# EAGLE board Remotuino-v3 (EAGLE 6.3)
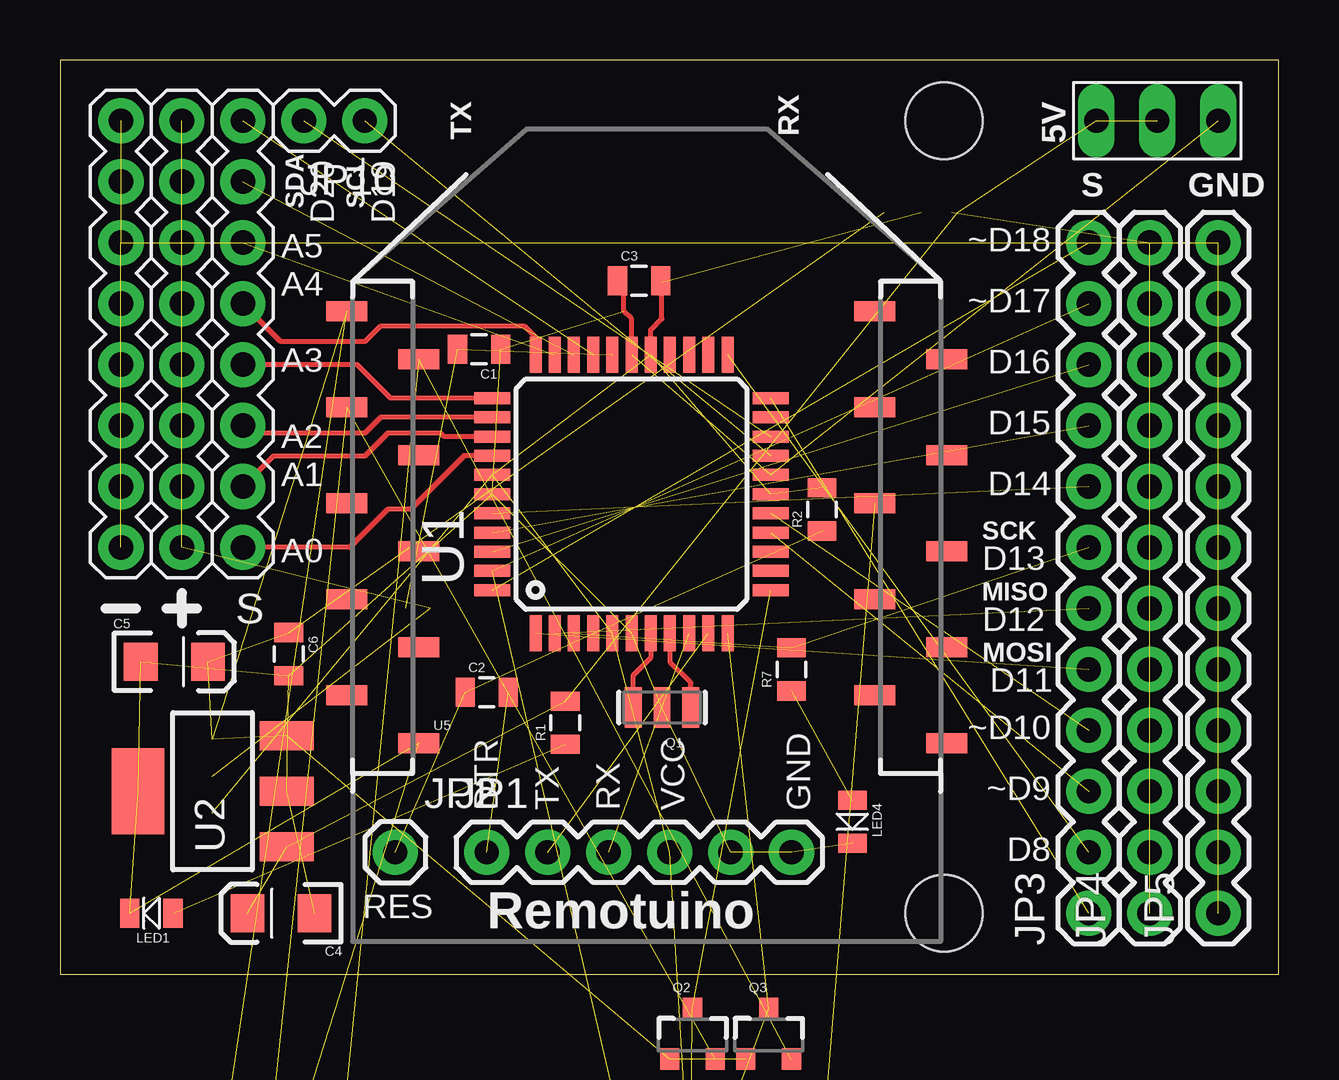
[diagram p0: board, top side]
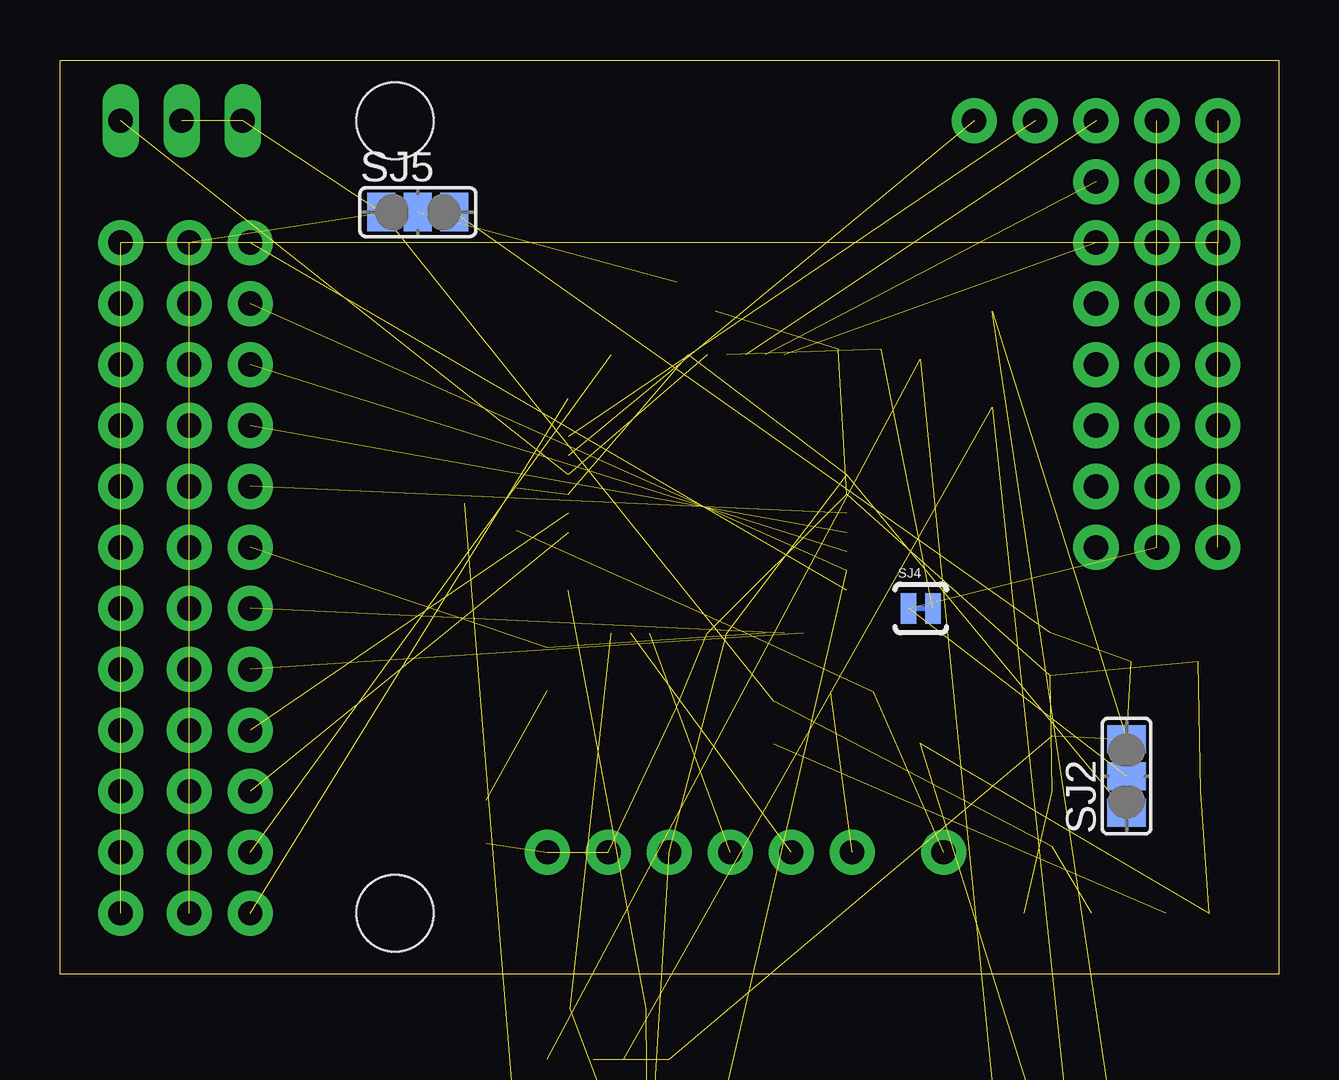
[diagram p1: board, bottom side, seen from below]

Size 50.79 x 38.09 mm. Coordinates in mm from the lower left corner, seen from the top.
Outline: 0,0 50.79,0 50.79,38.09 0,38.09 0,0
Copper layers (1*16): Top 0.035mm / dielectric 1.5mm / Bottom 0.035mm
Design rules "default *": minimum track width 10mil, minimum drill 24mil, track to track 8mil, track to pad 8mil, pad to pad 8mil, via to via 8mil, smd to smd 8mil, copper to edge 40mil, drill to drill 8mil, minimum pad ring 10mil, minimum via ring 8mil, stop-mask expansion 4mil, vias tented up to drill 0mil, thermal gap 10mil
Net classes: 0 default: width 0.203 mm; 1 vcc: width 0.254 mm
Holes 3.2 mm at 36.83,35.56 36.83,2.54
tRestrict: area 44.9,32.5 to 46.5,34.6

## Footprints (pad centres in the part's own frame; a part is rotated, then mirrored left to right if it is on the bottom)
0805 = smd 0.8 x 1.2: 1 -0.9,0; 2 0.9,0
EIA3216 = smd 1.4 x 1.6: A 1.4,0; C -1.4,0
1X06 = drill 1.016 pad 1.88: 1 0,0; 2 2.54,0; 3 5.08,0; 4 7.62,0; 5 10.16,0; 6 12.7,0
1X01 = drill 1.016 pad 1.88: 1 0,0
1X12 = drill 1.016 pad 1.88: 1 0,0; 2 2.54,0; 3 5.08,0; 4 7.62,0; 5 10.16,0; 6 12.7,0; 7 15.24,0; 8 17.78,0; 9 20.32,0; 10 22.86,0; 11 25.4,0; 12 27.94,0
1X08 = drill 1.016 pad 1.88: 1 0,0; 2 2.54,0; 3 5.08,0; 4 7.62,0; 5 10.16,0; 6 12.7,0; 7 15.24,0; 8 17.78,0
1X3_LONGPAD = drill 1.016 pad 1.245 long: 1 0,0; 2 -2.54,0; 3 -5.08,0
1X02 = drill 1.016 pad 1.88: 1 0,0; 2 2.54,0
LED-0805 = smd 0.8 x 1.2: 1 -0.9,0; 2 0.9,0
RESONATOR-SMD = smd 0.7 x 1.7: 1 -1.2,0; 2 0,0; 3 1.2,0
SOT23-3 = smd 0.8 x 0.9: 1 -0.95,-1; 2 0.95,-1; 3 0,1.1
SJ_2WAYS_1-2 = smd 1.168 x 1.6: 1 -1.524,0; 2 0,0; 3 1.524,0
SJ_2S-NO = smd 0.635 x 1.27: 1 -0.45,0; 2 0.45,0
SJ_2S-TRACE = smd 0.635 x 1.27: 1 -0.508,0; 2 0.508,0
TQFP44 = smd 1.5 x 0.5: 1 -5.8,4; 2 -5.8,3.2; 3 -5.8,2.4; 4 -5.8,1.6; 5 -5.8,0.8; 6 -5.8,0; 7 -5.8,-0.8; 8 -5.8,-1.6; 9 -5.8,-2.4; 10 -5.8,-3.2; 11 -5.8,-4; 23 5.8,-4; 24 5.8,-3.2; 25 5.8,-2.4; 26 5.8,-1.6; 27 5.8,-0.8; 28 5.8,0; 29 5.8,0.8; 30 5.8,1.6; 31 5.8,2.4; 32 5.8,3.2; 33 5.8,4 | smd 0.5 x 1.5: 12 -4,-5.8; 13 -3.2,-5.8; 14 -2.4,-5.8; 15 -1.6,-5.8; 16 -0.8,-5.8; 17 0,-5.8; 18 0.8,-5.8; 19 1.6,-5.8; 20 2.4,-5.8; 21 3.2,-5.8; 22 4,-5.8; 34 4,5.8; 35 3.2,5.8; 36 2.4,5.8; 37 1.6,5.8; 38 0.8,5.8; 39 0,5.8; 40 -0.8,5.8; 41 -1.6,5.8; 42 -2.4,5.8; 43 -3.2,5.8; 44 -4,5.8
SOT223 = smd 1.219 x 2.235: 1 -2.311,-3.099; 2 0,-3.099; 3 2.311,-3.099 | smd 3.6 x 2.2: 4 0,3.099
XBEE-SMD = smd 1.7 x 0.85: 1 -12.5,20; 2 -9.5,18; 3 -12.5,16; 4 -9.5,14; 5 -12.5,12; 6 -9.5,10; 7 -12.5,8; 8 -9.5,6; 9 -12.5,4; 10 -9.5,2; 11 12.5,2; 12 9.5,4; 13 12.5,6; 14 9.5,8; 15 12.5,10; 16 9.5,12; 17 12.5,14; 18 9.5,16; 19 12.5,18; 20 9.5,20

## Placement (x,y rotation side)
C1  0.1uF  [0805]  17.46,26.04 180 top
C2  0.1uF  [0805]  17.78,11.75 0 top
C3  0.1uF  [0805]  24.13,28.89 0 top
C4  10uF  [EIA3216]  9.21,2.54 180 top
C5  10uF  [EIA3216]  4.76,13.02 0 top
C6  0.1uF  [0805]  9.53,13.34 270 top
C8  0.1uF  [0805]  1.59,-35.88 0 top  (outside the outline)
JP1  FTDI Basic  [1X06]  17.78,5.08 0 top
JP2  RESET  [1X01]  13.97,5.08 0 top
JP3  M12  [1X12]  42.86,2.54 90 top
JP4  M12  [1X12]  45.4,2.54 90 top
JP5  M12  [1X12]  48.26,2.54 90 top
JP6  M8  [1X08]  7.62,17.78 90 top
JP7  M8  [1X08]  5.08,17.78 90 top
JP8  M8  [1X08]  2.54,17.78 90 top
JP9  M03  [1X3_LONGPAD]  48.26,35.56 0 top
JP10  [1X02]  12.7,35.56 180 top
LED1  Red  [LED-0805]  3.81,2.54 180 top
LED4  Red  [LED-0805]  33.02,6.35 270 top
LED5  Green  [LED-0805]  4.76,-35.88 0 top  (outside the outline)
LED6  Red  [LED-0805]  7.94,-35.88 0 top  (outside the outline)
Q1  16MHz  [RESONATOR-SMD]  25.08,11.11 180 top
Q2  BSS138  [SOT23-3]  26.35,-2.54 0 top
Q3  BSS138  [SOT23-3]  29.53,-2.54 0 top
R1  10K  [0805]  21.06,10.48 90 top
R2  10K  [0805]  31.75,19.37 90 top
R7  1K  [0805]  30.48,12.7 90 top
R8  1K  [0805]  11.11,-35.88 0 top  (outside the outline)
R9  1K  [0805]  14.29,-35.88 0 top  (outside the outline)
R10  1K  [0805]  17.46,-35.88 0 top  (outside the outline)
R11  1K  [0805]  20.64,-35.88 0 top  (outside the outline)
R12  1K  [0805]  23.81,-35.88 0 top  (outside the outline)
R13  1K  [0805]  26.99,-35.88 0 top  (outside the outline)
SJ2  [SJ_2WAYS_1-2]  6.35,8.26 90 bottom
SJ3  [SJ_2S-NO]  29.84,-36.2 0 top  (outside the outline)
SJ4  .  [SJ_2S-TRACE]  14.92,15.24 0 bottom
SJ5  [SJ_2WAYS_1-2]  35.88,31.75 0 bottom
U1  ATMEGA324P  [TQFP44]  23.81,20 90 top
U2  MIC5209-3.3YS  [SOT223]  6.35,7.62 90 top
U5  XBEE  [XBEE-SMD]  24.45,7.62 0 top
U$3  OSHW-LOGOS  [OSHW-LOGO-S]  1.59,-39.37 0 top  (outside the outline)

## Library data of the parts
C1-C6 C8 JP1-JP5 Q1 R1 R2 R7-R13 SJ3 SJ4 U$3 = SparkFun
JP6-JP10 LED1 LED4-LED6 SJ2 SJ5 U1 U2 U5 = wibauxl
Q2 Q3 = SparkFun-DiscreteSemi

## Nets
3.3V: C5.A C6.1 C8.2 Q2.1 Q3.1 R8.2 R9.1 R11.2 R12.2 SJ2.3 SJ5.3 U2.3 U5.1
A0/D24: JP6.1 U1.37
A1/D25: JP6.2 U1.36
A2/D26: JP6.3 U1.35
A3/D27: JP6.4 U1.34
A4/D28: JP6.5 U1.33
A5/D29: JP6.6 U1.32
A6/D30: JP6.7 U1.31
A7/D31: JP6.8 U1.30
AREF: C1.2 SJ4.2 U1.29
D0/RX: JP1.3 U1.9
D1/TX: JP1.2 U1.10
D2/RX1: Q3.3 R10.1 U1.11
D3/TX1: Q2.3 R13.1 U1.12
D4: U1.21
D5: U1.13
D6: U1.14
D7: JP3.1 U1.22
D8: JP3.2 U1.23
D9: JP3.3 U1.15
D10: JP3.4 U1.16
D11/MOSI: JP3.5 U1.1
D12/MISO: JP3.6 U1.2
D13/SCK: JP3.7 R7.2 U1.3
D14: JP3.8 U1.40
D15: JP3.9 U1.41
D16: JP3.10 U1.42
D17: JP3.11 SJ3.2 U1.43
D18: JP3.12 U1.44
D19/SCL: JP10.1 U1.19
D20/SDA: JP10.2 U1.20
D21: U1.24
D22: U1.25
D23: U1.26
DTR: C2.2 JP1.1
GND [vcc]: C1.1 C3.1 C4.C C5.C C6.2 C8.1 JP1.5 JP1.6 JP9.1 LED1.2 LED4.2 Q1.2 U1.6 U1.18 U1.28 U1.39 U2.2 U2.4 U5.10
N$1: Q1.1 U1.8
N$2: Q1.3 U1.7
N$5: LED4.1 R7.1
N$6: LED5.1 R8.1
N$7: LED6.1 R9.2
N$10 [vcc]: JP5.1 JP5.2 JP5.3 JP5.4 JP5.5 JP5.6 JP5.7 JP5.8 JP5.9 JP5.10 JP5.11 JP5.12 JP8.1 JP8.2 JP8.3 JP8.4 JP8.5 JP8.6 JP8.7 JP8.8
N$38: LED1.1 R1.1
RESET: C2.1 JP2.1 R2.1 U1.4
RTS: SJ3.1 U5.16
VAN: JP7.1 JP7.2 JP7.3 JP7.4 JP7.5 JP7.6 JP7.7 JP7.8 SJ2.2 SJ4.1
VCC [vcc]: C3.2 JP1.4 JP4.1 JP4.2 JP4.3 JP4.4 JP4.5 JP4.6 JP4.7 JP4.8 JP4.9 JP4.10 JP4.11 JP4.12 R2.2 R10.2 R13.2 SJ2.1 SJ5.2 U1.5 U1.17 U1.27 U1.38
VIN: C4.A JP9.2 JP9.3 R1.2 SJ5.1 U2.1
X_RX: LED5.2 Q2.2 R12.1 U5.3
X_TX: LED6.2 Q3.2 R11.1 U5.2

## Tracks (layer width: path | path; a pad name or v marks a point on that pad's centre or on a via)
3.3V  (12 unrouted)
A0/D24
  Top 0.203: U1.37 16.84,21.6 14.61,19.37 13.65,19.37 12.06,17.78 JP6.1
A1/D25
  Top 0.203: U1.36 16.02,22.4 15.88,22.54 13.65,22.54 12.7,21.59 8.89,21.59 JP6.2
A2/D26
  Top 0.203: U1.35 13.36,23.2 12.7,22.54 7.94,22.54 JP6.3
A3/D27
  Top 0.203: U1.34 13.78,24 12.38,25.4 JP6.4
A4/D28
  Top 0.203: U1.33 19.81,26.54 19.37,26.99 13.34,26.99 12.7,26.35 9.21,26.35 JP6.5
A5/D29  (1 unrouted)
A6/D30  (1 unrouted)
A7/D31  (1 unrouted)
AREF  (2 unrouted)
D0/RX  (1 unrouted)
D1/TX  (1 unrouted)
D2/RX1  (2 unrouted)
D3/TX1  (2 unrouted)
D7  (1 unrouted)
D8  (1 unrouted)
D9  (1 unrouted)
D10  (1 unrouted)
D11/MOSI  (1 unrouted)
D12/MISO  (1 unrouted)
D13/SCK  (2 unrouted)
D14  (1 unrouted)
D15  (1 unrouted)
D16  (1 unrouted)
D17  (2 unrouted)
D18  (1 unrouted)
D19/SCL  (1 unrouted)
D20/SDA  (1 unrouted)
DTR  (1 unrouted)
GND  (17 unrouted)
  Top 0.203: U1.28 23.81,27.3 23.5,27.62 23.5,28.63 C3.1
N$1
  Top 0.203: Q1.1 26.28,12.13 25.41,13.01 U1.8
N$2
  Top 0.203: U1.7 24.61,13.18 23.88,12.45 Q1.3
N$5  (1 unrouted)
N$6  (1 unrouted)
N$7  (1 unrouted)
N$10  (19 unrouted)
N$38  (1 unrouted)
RESET  (3 unrouted)
RTS  (1 unrouted)
VAN  (9 unrouted)
VCC  (21 unrouted)
  Top 0.203: U1.27 24.61,26.84 25.08,27.3 25.08,28.84 C3.2
VIN  (5 unrouted)
X_RX  (3 unrouted)
X_TX  (3 unrouted)

## Text on the board
tPlace: TX | RX | 5V | SDA | SCL | S | GND | D20 | D19 | ~D18 | A5 | ~D17 | A4 | D16 | A3 | D15 | A2 | D14 | A1 | SCK | A0 | D13 | MISO | S | D12 | MOSI | D11 | ~D10 | ~D9 | DTR | TX | RX | VCC | GND | D8 | RES | Remotuino